# EAGLE board untitled (EAGLE 6.1)
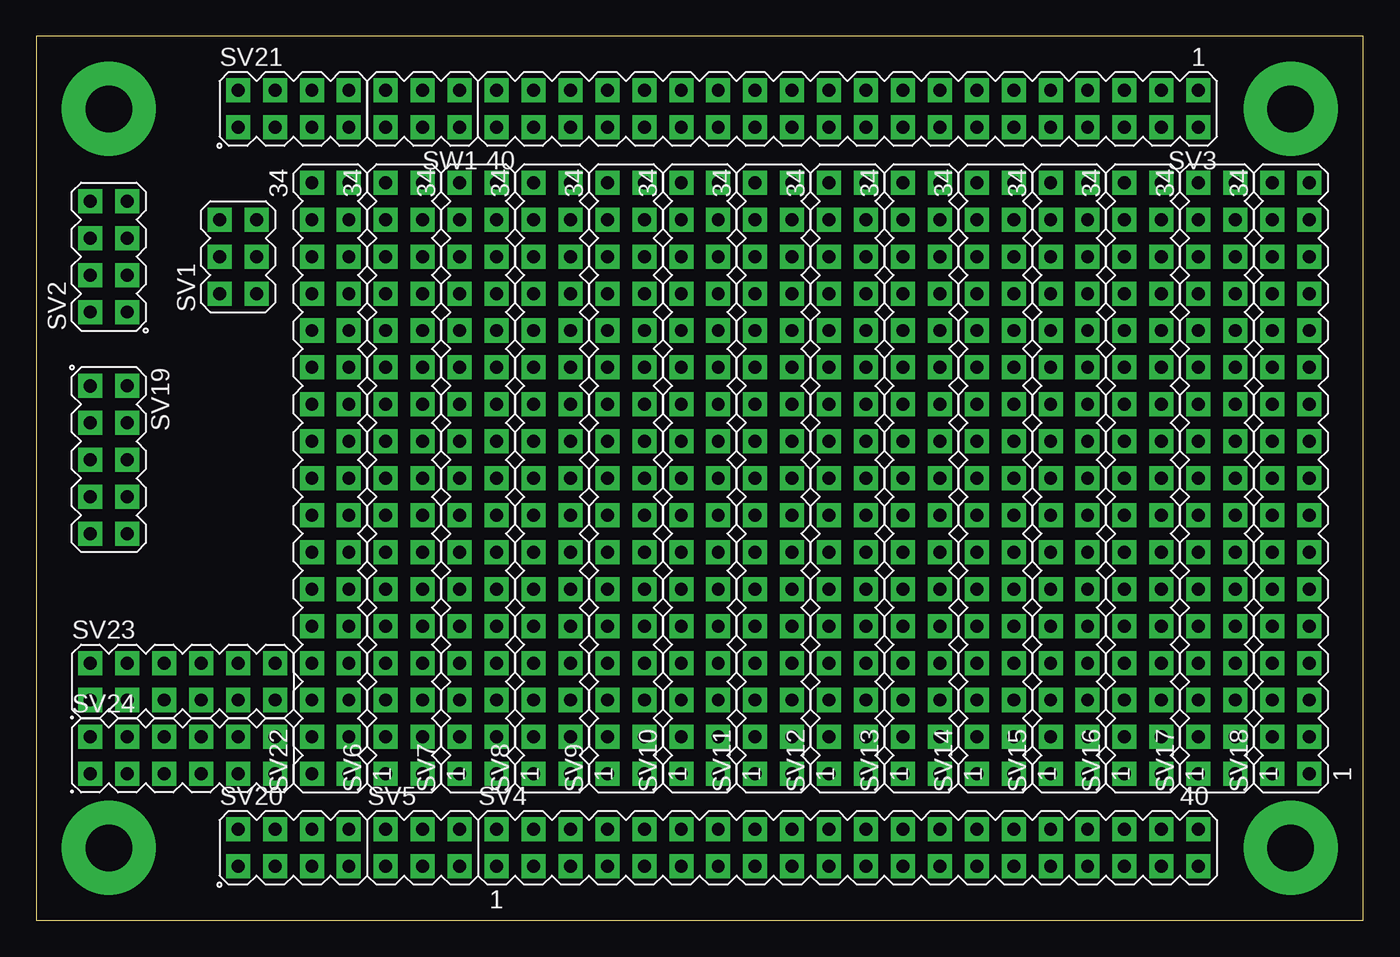
[diagram p0: board, top side]
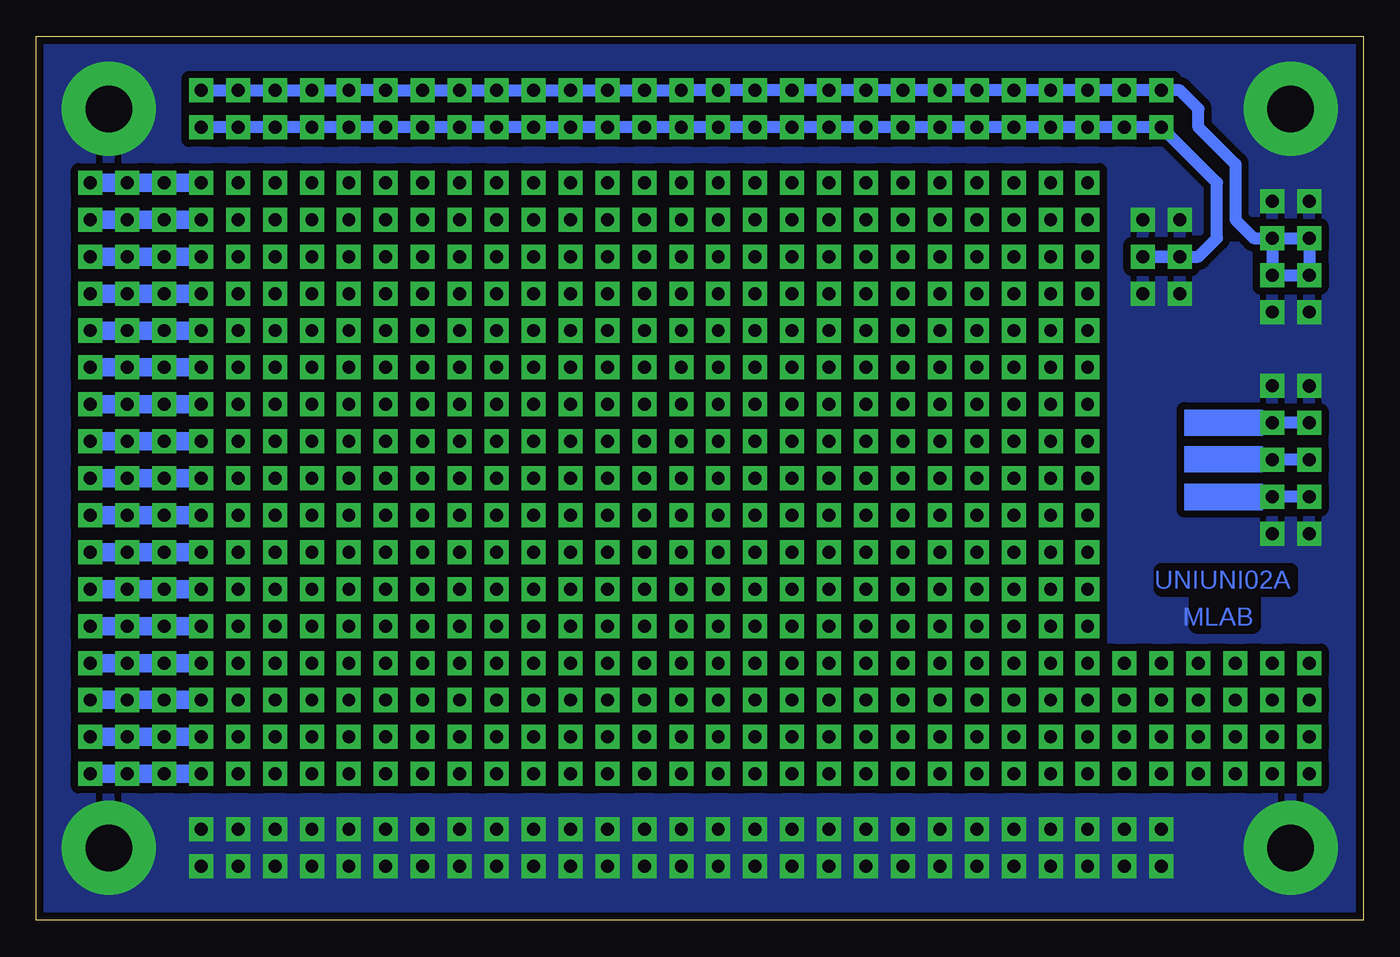
[diagram p1: board, bottom side, seen from below]

Size 91.24 x 60.76 mm. Coordinates in mm from the lower left corner, seen from the top.
Outline: 0,0 91.24,0 91.24,60.76 0,60.76 0,0
Copper layers (1*16): Top 0.035mm / dielectric 1mm / Bottom 0.035mm
Design rules: minimum track width 12mil, minimum drill 24mil, track to track 20mil, track to pad 20mil, pad to pad 20mil, via to via 20mil, smd to smd 8mil, copper to edge 20mil, drill to drill 70mil, minimum pad ring 10mil, minimum via ring 8mil, stop-mask expansion 5mil, vias tented up to drill 0mil, thermal gap 0mil

## Footprints (pad centres in the part's own frame; a part is rotated, then mirrored left to right if it is on the bottom)
MA03-2 = drill 0.889 pad 1.651 square: 1 -2.54,-1.27; 2 -2.54,1.27; 3 0,-1.27; 4 0,1.27; 5 2.54,-1.27; 6 2.54,1.27
MA04-2 = drill 0.889 pad 1.651 square: 1 -3.81,-1.27; 2 -3.81,1.27; 3 -1.27,-1.27; 4 -1.27,1.27; 5 1.27,-1.27; 6 1.27,1.27; 7 3.81,-1.27; 8 3.81,1.27
MA20-2 = drill 0.889 pad 1.651 square: 1 -24.13,-1.27; 2 -24.13,1.27; 3 -21.59,-1.27; 4 -21.59,1.27; 5 -19.05,-1.27; 6 -19.05,1.27; 7 -16.51,-1.27; 8 -16.51,1.27; 9 -13.97,-1.27; 10 -13.97,1.27; 11 -11.43,-1.27; 12 -11.43,1.27; 13 -8.89,-1.27; 14 -8.89,1.27; 15 -6.35,-1.27; 16 -6.35,1.27; 17 -3.81,-1.27; 18 -3.81,1.27; 19 -1.27,-1.27; 20 -1.27,1.27; 21 1.27,-1.27; 22 1.27,1.27; 23 3.81,-1.27; 24 3.81,1.27; 25 6.35,-1.27; 26 6.35,1.27; 27 8.89,-1.27; 28 8.89,1.27; 29 11.43,-1.27; 30 11.43,1.27; 31 13.97,-1.27; 32 13.97,1.27; 33 16.51,-1.27; 34 16.51,1.27; 35 19.05,-1.27; 36 19.05,1.27; 37 21.59,-1.27; 38 21.59,1.27; 39 24.13,-1.27; 40 24.13,1.27
MA17-2 = drill 0.889 pad 1.651 square: 1 -20.32,-1.27; 2 -20.32,1.27; 3 -17.78,-1.27; 4 -17.78,1.27; 5 -15.24,-1.27; 6 -15.24,1.27; 7 -12.7,-1.27; 8 -12.7,1.27; 9 -10.16,-1.27; 10 -10.16,1.27; 11 -7.62,-1.27; 12 -7.62,1.27; 13 -5.08,-1.27; 14 -5.08,1.27; 15 -2.54,-1.27; 16 -2.54,1.27; 17 0,-1.27; 18 0,1.27; 19 2.54,-1.27; 20 2.54,1.27; 21 5.08,-1.27; 22 5.08,1.27; 23 7.62,-1.27; 24 7.62,1.27; 25 10.16,-1.27; 26 10.16,1.27; 27 12.7,-1.27; 28 12.7,1.27; 29 15.24,-1.27; 30 15.24,1.27; 31 17.78,-1.27; 32 17.78,1.27; 33 20.32,-1.27; 34 20.32,1.27
MA05-2 = drill 0.914 pad 1.651 square: 1 -5.08,-1.27 | drill 0.889 pad 1.651 square: 2 -5.08,1.27; 3 -2.54,-1.27; 4 -2.54,1.27; 5 0,-1.27; 6 0,1.27; 7 2.54,-1.27; 8 2.54,1.27; 9 5.08,-1.27; 10 5.08,1.27
MA06-2 = drill 0.889 pad 1.651 square: 1 -6.35,-1.27; 2 -6.35,1.27; 3 -3.81,-1.27; 4 -3.81,1.27; 5 -1.27,-1.27; 6 -1.27,1.27; 7 1.27,-1.27; 8 1.27,1.27; 9 3.81,-1.27; 10 3.81,1.27; 11 6.35,-1.27; 12 6.35,1.27
SROUB3M = drill 3.2 pad 6.452: P$1 0,0

## Placement (x,y rotation side)
SV1  [MA03-2]  13.87,45.62 90 top
SV2  [MA04-2]  4.98,45.62 90 top
SV3  [MA20-2]  55.78,55.78 180 top
SV4  [MA20-2]  55.78,4.98 0 top
SV5  [MA03-2]  26.57,4.98 0 top
SV6  [MA17-2]  25.3,30.38 90 top
SV7  [MA17-2]  30.38,30.38 90 top
SV8  [MA17-2]  35.46,30.38 90 top
SV9  [MA17-2]  40.54,30.38 90 top
SV10  [MA17-2]  45.62,30.38 90 top
SV11  [MA17-2]  50.7,30.38 90 top
SV12  [MA17-2]  55.78,30.38 90 top
SV13  [MA17-2]  60.86,30.38 90 top
SV14  [MA17-2]  65.94,30.38 90 top
SV15  [MA17-2]  71.02,30.38 90 top
SV16  [MA17-2]  76.1,30.38 90 top
SV17  [MA17-2]  81.18,30.38 90 top
SV18  [MA17-2]  86.26,30.38 90 top
SV19  [MA05-2]  4.98,31.65 270 top
SV20  [MA04-2]  17.68,4.98 0 top
SV21  [MA04-2]  17.68,55.78 0 top
SV22  [MA17-2]  20.22,30.38 90 top
SV23  [MA06-2]  10.06,16.41 0 top
SV24  [MA06-2]  10.06,11.33 0 top
SW1  [MA03-2]  26.57,55.78 180 top
X3  SROUB3M  [SROUB3M]  4.98,55.78 0 top
X4  SROUB3M  [SROUB3M]  86.26,55.78 0 top
X5  SROUB3M  [SROUB3M]  86.26,4.98 0 top
X6  SROUB3M  [SROUB3M]  4.98,4.98 0 top

## Library data of the parts
SV1-SV20 SV22-SV24 = moje_hrebinky; OC_FARNELL: unknown; OC_NEWARK: unknown
SV21 SW1 = moje_hrebinky
X3-X6 = moje

## Nets
+5V: SV1.3 SV1.4 SV3.2 SV3.4 SV3.6 SV3.8 SV3.10 SV3.12 SV3.14 SV3.16 SV3.18 SV3.20 SV3.22 SV3.24 SV3.26 SV3.28 SV3.30 SV3.32 SV3.34 SV3.36 SV3.38 SV3.40 SV21.1 SV21.3 SV21.5 SV21.7 SW1.2 SW1.4 SW1.6
+12V: SV2.3 SV2.4 SV2.5 SV2.6 SV3.1 SV3.3 SV3.5 SV3.7 SV3.9 SV3.11 SV3.13 SV3.15 SV3.17 SV3.19 SV3.21 SV3.23 SV3.25 SV3.27 SV3.29 SV3.31 SV3.33 SV3.35 SV3.37 SV3.39 SV21.2 SV21.4 SV21.6 SV21.8 SW1.1 SW1.3 SW1.5
GND: SV1.1 SV1.2 SV1.5 SV1.6 SV2.1 SV2.2 SV2.7 SV2.8 SV4.1 SV4.2 SV4.3 SV4.4 SV4.5 SV4.6 SV4.7 SV4.8 SV4.9 SV4.10 SV4.11 SV4.12 SV4.13 SV4.14 SV4.15 SV4.16 SV4.17 SV4.18 SV4.19 SV4.20 SV4.21 SV4.22 SV4.23 SV4.24 SV4.25 SV4.26 SV4.27 SV4.28 SV4.29 SV4.30 SV4.31 SV4.32 SV4.33 SV4.34 SV4.35 SV4.36 SV4.37 SV4.38 SV4.39 SV4.40 SV5.1 SV5.2 SV5.3 SV5.4 SV5.5 SV5.6 SV19.1 SV19.2 SV19.9 SV19.10 SV20.1 SV20.2 SV20.3 SV20.4 SV20.5 SV20.6 SV20.7 SV20.8 X3.P$1 X4.P$1 X5.P$1 X6.P$1
N$1: SV19.3 SV19.4
N$2: SV19.5 SV19.6
N$3: SV19.7 SV19.8
N$4: SV17.33 SV17.34 SV18.33 SV18.34
N$5: SV17.31 SV17.32
N$6: SV17.29 SV17.30 SV18.29 SV18.30
N$7: SV17.27 SV17.28 SV18.27 SV18.28
N$8: SV17.25 SV17.26 SV18.25 SV18.26
N$9: SV17.23 SV17.24
N$10: SV17.21 SV17.22 SV18.21 SV18.22
N$11: SV17.19 SV17.20
N$12: SV17.17 SV17.18
N$13: SV17.15 SV17.16
N$14: SV17.13 SV17.14 SV18.13 SV18.14
N$15: SV17.11 SV17.12 SV18.11 SV18.12
N$16: SV17.9 SV17.10
N$17: SV17.7 SV17.8 SV18.7 SV18.8
N$18: SV17.5 SV17.6 SV18.5 SV18.6
N$19: SV17.3 SV17.4 SV18.3 SV18.4
N$20: SV17.1 SV17.2
N$22: SV18.31 SV18.32
N$26: SV18.23 SV18.24
N$28: SV18.19 SV18.20
N$29: SV18.17 SV18.18
N$30: SV18.15 SV18.16
N$33: SV18.9 SV18.10
N$36: SV18.1 SV18.2

## Tracks (layer width: path | path; a pad name or v marks a point on that pad's centre or on a via)
+5V
  Bottom 0.813: SV3.2 SV3.4 SV3.6 SV3.8 SV3.10 SV3.12 SV3.14 SV3.16 SV3.18 SV3.20 SV3.22 SV3.24 SV3.26 SV3.28 SV3.30 SV3.32 SV3.34 SV3.36 SV3.38 SV3.40 SW1.2 SW1.4 SW1.6 SV21.7 SV21.5 SV21.3 SV21.1 10.06,50.7 10.06,46.89 11.33,45.62 SV1.3 SV1.4
+12V
  Bottom 0.813: SV3.1 SV3.3 SV3.5 SV3.7 SV3.9 SV3.11 SV3.13 SV3.15 SV3.17 SV3.19 SV3.21 SV3.23 SV3.25 SV3.27 SV3.29 SV3.31 SV3.33 SV3.35 SV3.37 SV3.39 SW1.1 SW1.3 SW1.5 SV21.8 SV21.6 SV21.4 SV21.2 12.6,57.05 11.33,55.78 11.33,54.51 8.79,51.97 8.79,48.16 7.52,46.89 SV2.5 | SV2.5 SV2.3 SV2.4 SV2.6 SV2.5
GND
  pour Bottom: -0.1,60.86 -0.1,-0.1 91.34,-0.1 91.34,60.86
N$1
  Bottom 0.813: SV19.3 SV19.4
N$2
  Bottom 0.813: SV19.5 SV19.6
N$3
  Bottom 0.813: SV19.7 SV19.8
N$4
  Bottom 1.27: SV17.34 SV17.33 SV18.34 SV18.33
N$5
  Bottom 1.27: 87.53,48.16 SV17.31 SV17.32
N$6
  Bottom 1.27: SV17.30 SV17.29 SV18.30 SV18.29
N$7
  Bottom 1.27: SV17.28 SV17.27 SV18.28 SV18.27
N$8
  Bottom 1.27: SV18.25 SV18.26 SV17.25 SV17.26
N$9
  Bottom 1.27: 87.53,38 SV17.23 SV17.24
N$10
  Bottom 1.27: SV17.22 SV17.21 SV18.22 SV18.21
N$11
  Bottom 1.27: 87.53,32.92 SV17.19 SV17.20
N$12
  Bottom 1.27: 87.53,30.38 SV17.17 SV17.18
N$13
  Bottom 1.27: 87.53,27.84 SV17.15 81.18,27.84 SV17.16
N$14
  Bottom 1.27: SV17.14 SV17.13 SV18.14 SV18.13
N$15
  Bottom 1.27: SV17.12 SV17.11 SV18.12 SV18.11
N$16
  Bottom 1.27: 87.53,20.22 SV17.9 SV17.10
N$17
  Bottom 1.27: SV17.8 SV17.7 SV18.8 SV18.7
N$18
  Bottom 1.27: SV17.6 SV17.5 SV18.6 SV18.5
N$19
  Bottom 1.27: SV17.4 SV17.3 SV18.4 SV18.3
N$20
  Bottom 1.27: SV17.2 81.18,10.06 SV17.1 87.53,10.06
N$22
  Bottom 1.27: SV18.32 SV18.31
N$26
  Bottom 1.27: SV18.24 SV18.23
N$28
  Bottom 1.27: SV18.20 SV18.19
N$29
  Bottom 1.27: SV18.18 SV18.17
N$30
  Bottom 1.27: SV18.16 SV18.15
N$33
  Bottom 1.27: SV18.10 SV18.9
N$36
  Bottom 1.27: SV18.1 SV18.2
(copper drawn outside any net)
  shapes: Bottom area x3

## Text on the board
Bottom: UNIUNI02A | MLAB